# Altium PCB PCB_Robot_Version_1_2_2022-05-04.pcbdoc (part 1 of 2)
Units mil, origin at the board's own origin, x right, y up, seen from the top; angles counter-clockwise.
Board outline 7789.53 x 3844.65 mil, 2 copper layers (Top Layer, Bottom Layer); 136 components, 177 nets, 580 pads, 381 vias.
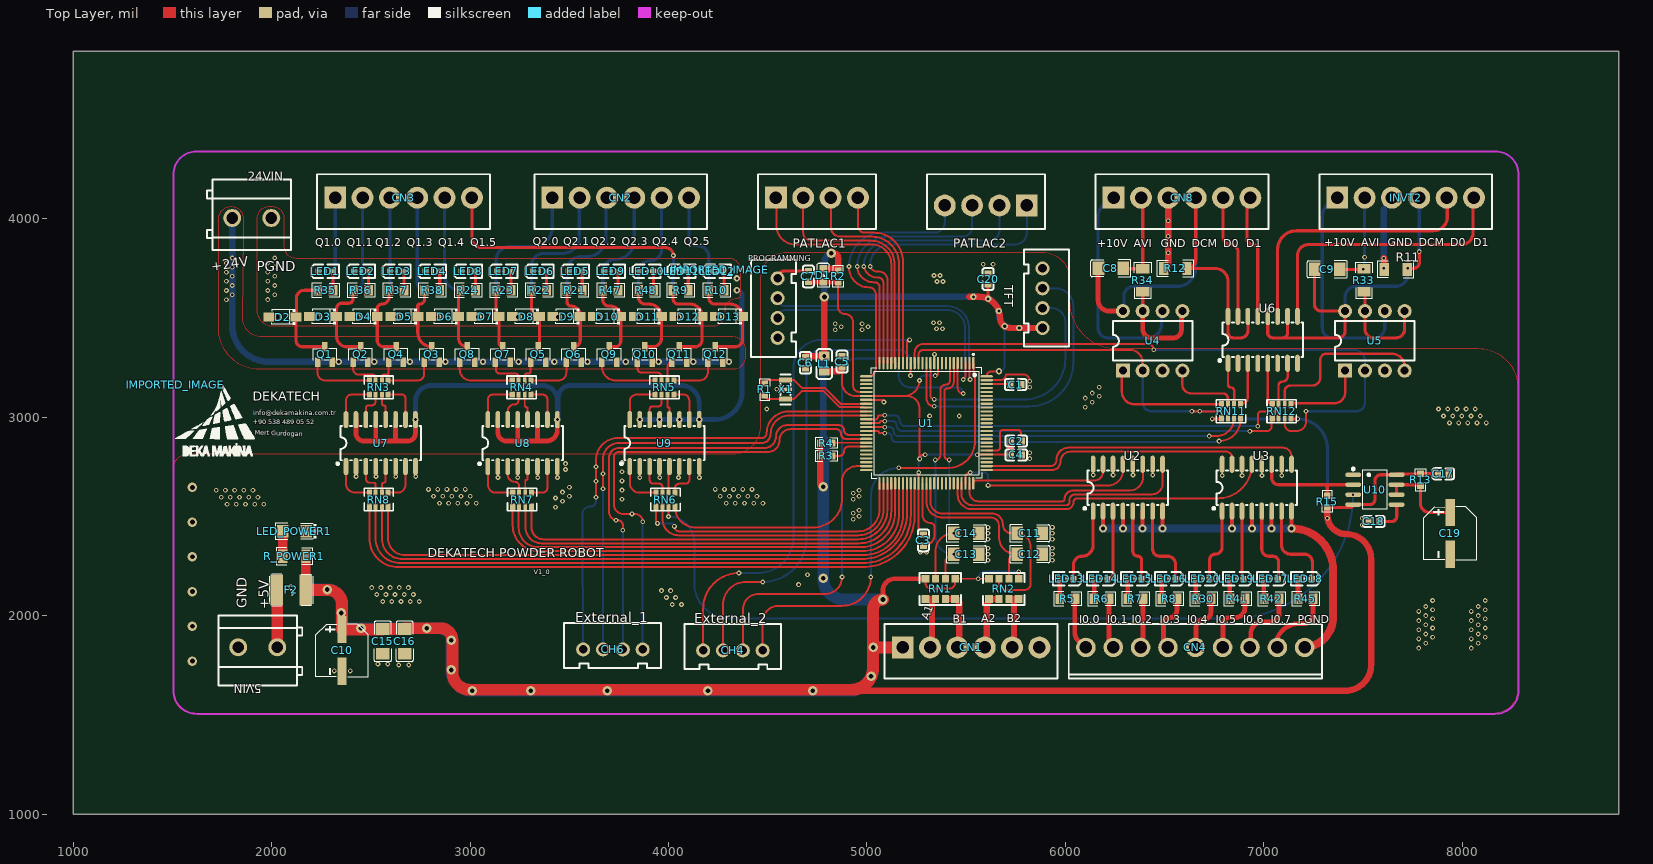
[diagram p0: Top Layer view]
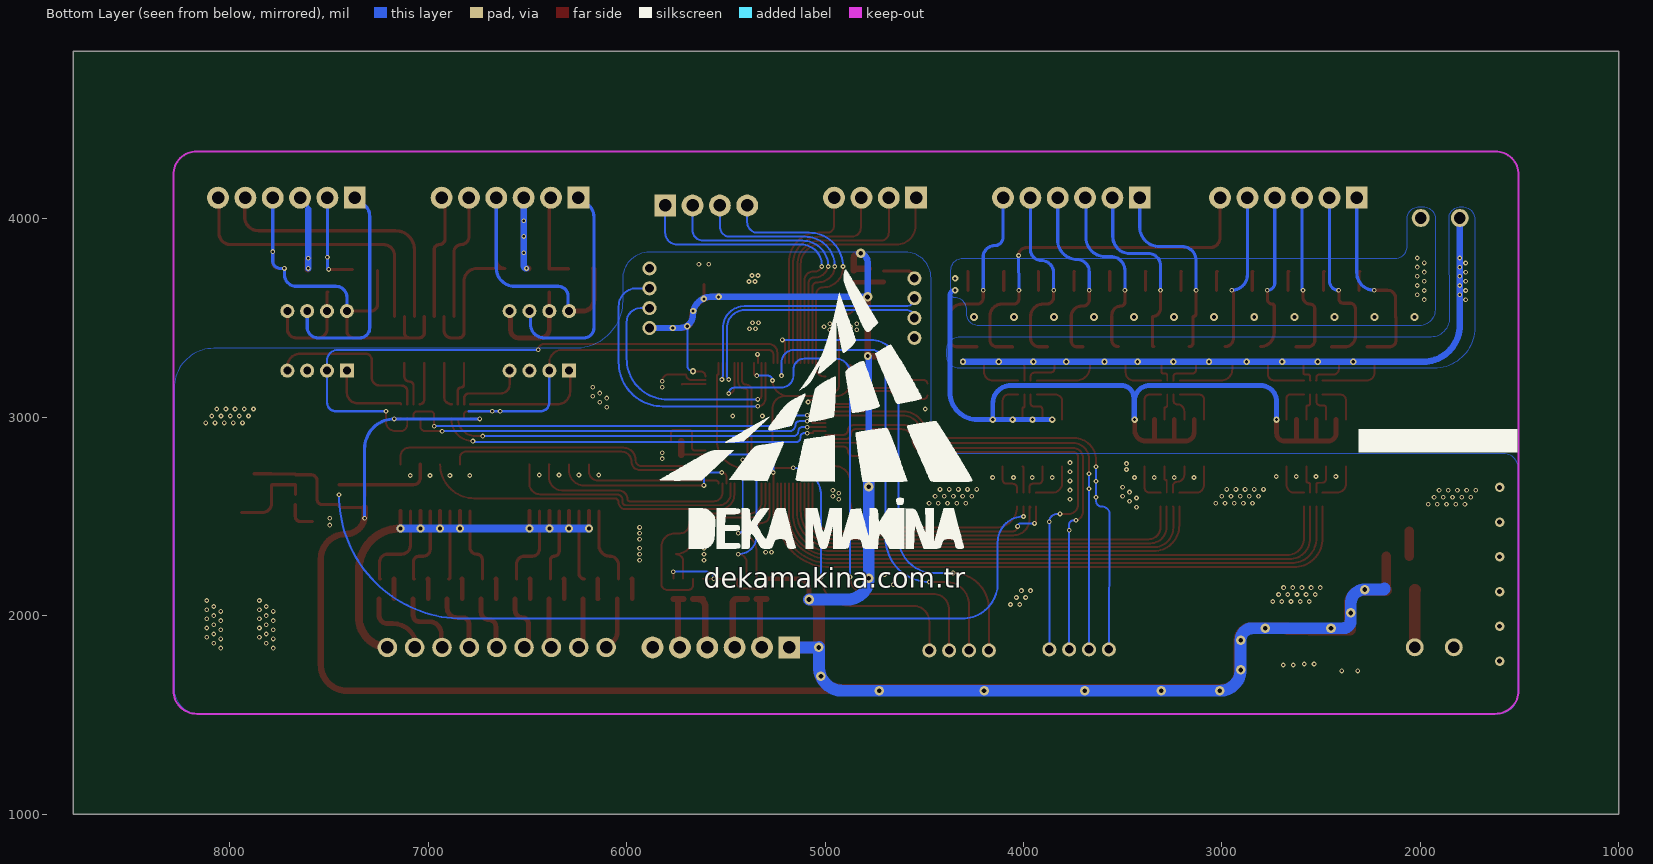
[diagram p1: Bottom Layer view, seen from below]

## Layer stack, top to bottom
Top Layer: signal copper (thickness not stored)
Dielectric: dielectric 12.6, FR-4, Dk 4.8
Bottom Layer: signal copper (thickness not stored)

## Board outline
8789.53,1000 1000,1000 1000,4844.65 8789.53,4844.65

## Components (designator, comment, footprint, x,y, rotation, side; value= is the part's Value field where it differs from the comment)
5VIN "DG125-5.0-02P-14-00A(H)" CONN-TH_DG125-5.0-02P-14-00A 1930.08,1824.65 r180 top
24VIN "DG125-5.0-02P-14-00A(H)" CONN-TH_DG125-5.0-02P-14-00A 1900.08,4019.65 r0 top
C1 "0.1u" C0603 5750.08,3164.65 r180 top
C2 "0.1u" C0603 5752.58,2879.65 r180 top
C3 "0.1u" C0603 5285.08,2379.65 r90 top
C4 "0.1u" C0603 5752.58,2809.65 r180 top
C5 "0.1u" C0603 4875.08,3279.65 r270 top
C6 "1u" C0603 4690.08,3274.65 r90 top
C7 "100nF" C0603 4705.08,3709.65 r90 top
C8 "10u" C1206 6230.08,3749.65 r0 top
C9 "10u" C1206 7320.08,3744.65 r0 top
C10 "220uF" CAP-SMD_BD6.3-L6.6-W6.6-FD 2355.08,1824.65 r270 top
C11 "0.01u" C1206 5820.08,2414.65 r180 top
C12 "0.01u" C1206 5820.08,2309.65 r180 top
C13 "0.01u" C1206 5500.08,2309.65 r180 top
C14 "0.01u" C1206 5500.08,2414.65 r180 top
C15 "0.1u" C1206 2560.08,1869.65 r90 top
C16 "0.1u" C1206 2670.08,1869.65 r90 top
C17 "0.1u" C0603 7905.08,2714.65 r0 top
C18 "10nF" C0603 7555.08,2474.65 r0 top
C19 "220uF" CAP-SMD_BD6.3-L6.6-W6.6-FD 7940.08,2414.65 r270 top
C20 "0.1u" C0603 5610.93,3696.26 r270 top
CH4 "Expin" DS1069-4 4375.08,1824.65 r180 top
CH6 "Expin1" DS1069-4 3770.08,1829.65 r180 top
CN1 "JL15EDGVC-35006G01" CONN-TH_6P-P3.50_JL15EDGVC-35006G01 5525.08,1839.65 r0 top
CN2 "JL15EDGVC-35006G01" CONN-TH_6P-P3.50_JL15EDGVC-35006G01 3759.01,4106.2 r0 top
CN3 "JL15EDGVC-35006G01" CONN-TH_6P-P3.50_JL15EDGVC-35006G01 2665.08,4106.2 r0 top
CN4 "JL15EDGVC-35009G01" CONN-TH_9P-P3.50_JL15EDGVC-35009G01 6655.08,1839.65 r0 top
CN8 "JL15EDGVC-35006G01" CONN-TH_6P-P3.50_JL15EDGVC-35006G01 6588.17,4106.2 r0 top
D1 "TS4148C" D0603 4780.08,3714.65 r270 top
D2 "ES1006FL-R1-00001" SOD-123FL_L2.7-W1.8-LS3.8-RD 2055.08,3504.65 r180 top
D3 "ES1006FL-R1-00001" SOD-123FL_L2.7-W1.8-LS3.8-RD 2259.62,3507.15 r180 top
D4 "ES1006FL-R1-00001" SOD-123FL_L2.7-W1.8-LS3.8-RD 2464.17,3507.15 r180 top
D5 "ES1006FL-R1-00001" SOD-123FL_L2.7-W1.8-LS3.8-RD 2668.71,3507.15 r180 top
D6 "ES1006FL-R1-00001" SOD-123FL_L2.7-W1.8-LS3.8-RD 2873.26,3507.15 r180 top
D7 "ES1006FL-R1-00001" SOD-123FL_L2.7-W1.8-LS3.8-RD 3077.81,3507.15 r180 top
D8 "ES1006FL-R1-00001" SOD-123FL_L2.7-W1.8-LS3.8-RD 3282.35,3507.15 r180 top
D9 "ES1006FL-R1-00001" SOD-123FL_L2.7-W1.8-LS3.8-RD 3486.9,3507.15 r180 top
D10 "ES1006FL-R1-00001" SOD-123FL_L2.7-W1.8-LS3.8-RD 3691.44,3507.15 r180 top
D11 "ES1006FL-R1-00001" SOD-123FL_L2.7-W1.8-LS3.8-RD 3895.99,3507.15 r180 top
D12 "ES1006FL-R1-00001" SOD-123FL_L2.7-W1.8-LS3.8-RD 4100.54,3507.15 r180 top
D13 "ES1006FL-R1-00001" SOD-123FL_L2.7-W1.8-LS3.8-RD 4305.08,3507.15 r180 top
F2 "FSMD050-30-R" F1812 2100.08,2129.65 r180 top
IMPORTED_IMAGE "IMPORTED_IMAGE" IMPORTED_IMAGE 4258.7,3744.16 r0 top
IMPORTED_IMAGE "IMPORTED_IMAGE" IMPORTED_IMAGE 1514.18,3163.4 r0 top
INVT2 "JL15EDGVC-35006G01" CONN-TH_6P-P3.50_JL15EDGVC-35006G01 7715.08,4106.2 r0 top
L1 "10uH" L0805 4785.08,3269.65 r90 top
LED1 "HL-PST-1608S22OC" LED0603-R-RD_ORANGE 2270.45,3734.65 r0 top
LED2 "HL-PST-1608S22OC" LED0603-R-RD_ORANGE 2450.45,3734.65 r0 top
LED3 "HL-PST-1608S22OC" LED0603-R-RD_ORANGE 2630.45,3734.65 r0 top
LED4 "HL-PST-1608S22OC" LED0603-R-RD_ORANGE 2810.45,3734.65 r0 top
LED5 "HL-PST-1608S22OC" LED0603-R-RD_ORANGE 3530.45,3734.65 r0 top
LED6 "HL-PST-1608S22OC" LED0603-R-RD_ORANGE 3350.45,3734.65 r0 top
LED7 "HL-PST-1608S22OC" LED0603-R-RD_ORANGE 3170.45,3734.65 r0 top
LED8 "HL-PST-1608S22OC" LED0603-R-RD_ORANGE 2990.45,3734.65 r0 top
LED9 "HL-PST-1608S22OC" LED0603-R-RD_ORANGE 3710.45,3734.65 r0 top
LED10 "HL-PST-1608S22OC" LED0603-R-RD_ORANGE 3890.45,3734.65 r0 top
LED11 "HL-PST-1608S22OC" LED0603-R-RD_ORANGE 4066.44,3734.65 r0 top
LED12 "HL-PST-1608S22OC" LED0603-R-RD_ORANGE 4245.95,3734.65 r0 top
LED13 "HL-PST-1608S22OC" LED0603-R-RD_ORANGE 6007.94,2184.65 r180 top
LED14 "HL-PST-1608S22OC" LED0603-R-RD_ORANGE 6179.36,2184.65 r180 top
LED15 "HL-PST-1608S22OC" LED0603-R-RD_ORANGE 6350.79,2184.65 r180 top
LED16 "HL-PST-1608S22OC" LED0603-R-RD_ORANGE 6522.22,2184.65 r180 top
LED17 "HL-PST-1608S22OC" LED0603-R-RD_ORANGE 7036.51,2184.65 r180 top
LED18 "HL-PST-1608S22OC" LED0603-R-RD_ORANGE 7207.94,2184.65 r180 top
LED19 "LED19" LED0603-R-RD_ORANGE 6865.08,2184.65 r180 top
LED20 "HL-PST-1608S22OC" LED0603-R-RD_ORANGE 6693.65,2184.65 r180 top
LED_POWER1 "15-21SURC/S530-A3/TR8" LED1206-R-RD 2115.08,2424.65 r180 top
PATLAC1 "JL15EDGVC-35004G01" CONN-TH_4P-P3.50_JL15EDGVC-35004G01 4748.13,4106.2 r0 top
PATLAC2 "JL15EDGVC-35004G01" CONN-TH_4P-P3.50_JL15EDGVC-35004G01 5599.25,4066.83 r180 top
PROGRAMMING "CHU-4 (DS1069-4 M)" DS1069-4 4550.08,3599.65 r270 top
Q1 "MMBT2907ALT1G" SOT-23-3_L2.9-W1.3-P1.90-LS2.4-BR 2269.09,3316.14 r270 top
Q2 "MMBT2907ALT1G" SOT-23-3_L2.9-W1.3-P1.90-LS2.4-BR 2448.18,3316.14 r270 top
Q3 "MMBT2907ALT1G" SOT-23-3_L2.9-W1.3-P1.90-LS2.4-BR 2806.36,3316.14 r270 top
Q4 "MMBT2907ALT1G" SOT-23-3_L2.9-W1.3-P1.90-LS2.4-BR 2627.27,3316.14 r270 top
Q5 "MMBT2907ALT1G" SOT-23-3_L2.9-W1.3-P1.90-LS2.4-BR 3343.64,3316.14 r270 top
Q6 "MMBT2907ALT1G" SOT-23-3_L2.9-W1.3-P1.90-LS2.4-BR 3522.73,3316.14 r270 top
Q7 "MMBT2907ALT1G" SOT-23-3_L2.9-W1.3-P1.90-LS2.4-BR 3164.55,3316.14 r270 top
Q8 "MMBT2907ALT1G" SOT-23-3_L2.9-W1.3-P1.90-LS2.4-BR 2985.45,3316.14 r270 top
Q9 "MMBT2907ALT1G" SOT-23-3_L2.9-W1.3-P1.90-LS2.4-BR 3701.82,3316.14 r270 top
Q10 "MMBT2907ALT1G" SOT-23-3_L2.9-W1.3-P1.90-LS2.4-BR 3880.9,3316.14 r270 top
Q11 "MMBT2907ALT1G" SOT-23-3_L2.9-W1.3-P1.90-LS2.4-BR 4055.08,3316.14 r270 top
Q12 "MMBT2907ALT1G" SOT-23-3_L2.9-W1.3-P1.90-LS2.4-BR 4235.49,3316.14 r270 top
R1 "1M" R0603 4485.08,3139.65 r270 top
R2 "10k" R0603_NEW 4855.08,3709.65 r90 top
R3 "10k" R0603_NEW 4795.08,2804.65 r180 top
R4 "10k" R0603_NEW 4795.08,2869.65 r180 top
R5 "2.2k" R1206#1 6010.08,2084.65 r180 top
R6 "2.2k" R1206#1 6181.51,2084.65 r180 top
R7 "2.2k" R1206#1 6352.94,2084.65 r180 top
R8 "2.2k" R1206#1 6524.37,2084.65 r180 top
R9 "5.6k" R0805 4061.44,3639.65 r180 top
R10 "5.6k" R0805 4241.44,3639.65 r180 top
R11 "0" R1206#2 7665.08,3744.65 r0 top
R12 "0" R1206#2 6555.08,3749.65 r0 top
R13 "10k" R0603 7790.08,2684.65 r270 top
R15 "10k" R0603 7320.08,2574.65 r90 top
R21 "5.6k" R0805 3527.43,3639.65 r180 top
R22 "5.6k" R0805 3347.93,3639.65 r180 top
R23 "5.6k" R0805 3168.43,3639.65 r180 top
R24 "5.6k" R0805 2988.92,3639.65 r180 top
R30 "2.2k" R1206#1 6695.79,2084.65 r180 top
R33 "2.2k" R1206#2 7505.08,3689.65 r270 top
R34 "2.2k" R1206#2 6390.08,3689.65 r270 top
R35 "5.6k" R0805 2270.91,3639.65 r180 top
R36 "5.6k" R0805 2450.41,3639.65 r180 top
R37 "5.6k" R0805 2629.91,3639.65 r180 top
R38 "5.6k" R0805 2809.42,3639.65 r180 top
R41 "2.2k" R1206#1 6867.22,2084.65 r180 top
R42 "2.2k" R1206#1 7038.65,2084.65 r180 top
R45 "2.2k" R1206#1 7210.08,2084.65 r180 top
R47 "5.6k" R0805 3706.94,3639.65 r180 top
R48 "5.6k" R0805 3886.44,3639.65 r180 top
R_POWER1 "4.7k" R1206#2 2115.08,2299.65 r180 top
RN1 "YC324-JK-0710KL" RES-ARRAY-SMD_0805-8P-L5.08-W3.2-BL 5370.08,2134.65 r0 top
RN2 "YC324-JK-0710KL" RES-ARRAY-SMD_0805-8P-L5.08-W3.2-BL 5690.08,2134.65 r0 top
RN3 "33kΩ" RES-ARRAY-SMD_0603-8P-L3.2-W1.6-BL 2540.08,3149.65 r0 top
RN4 "33kΩ" RES-ARRAY-SMD_0603-8P-L3.2-W1.6-BL 3260.08,3149.65 r0 top
RN5 "33kΩ" RES-ARRAY-SMD_0603-8P-L3.2-W1.6-BL 3980.08,3149.65 r0 top
RN6 "470" RES-ARRAY-SMD_0603-8P-L3.2-W1.6-BL 3985.08,2584.65 r0 top
RN7 "470" RES-ARRAY-SMD_0603-8P-L3.2-W1.6-BL 3262.58,2584.65 r0 top
RN8 "470" RES-ARRAY-SMD_0603-8P-L3.2-W1.6-BL 2540.08,2584.65 r0 top
RN11 "470" RES-ARRAY-SMD_0603-8P-L3.2-W1.6-BL 6835.08,3029.65 r0 top
RN12 "470" RES-ARRAY-SMD_0603-8P-L3.2-W1.6-BL 7090.08,3029.65 r0 top
TFT "CHU-4 (DS1069-4 M)" DS1069-4 5885.08,3549.65 r90 top
U1 "ATMEGA2560-16AU" TQFP-100_L14.0-W14.0-P0.50-LS16.0-BL 5300.08,2969.65 r180 top
U2 "IS2801-4" SOP-16_L10.3-W4.4-P1.27-LS7.0-BL 6315.08,2644.65 r0 top
U3 "IS2801-4" SOP-16_L10.3-W4.4-P1.27-LS7.0-BL 6965.08,2644.65 r0 top
U4 "MCT6" DIP-8_L9.7-W6.4-P2.54-LS7.6-BL 6440.08,3384.65 r0 top
U5 "MCT6" DIP-8_L9.7-W6.4-P2.54-LS7.6-BL 7560.08,3384.65 r0 top
U6 "IS2801-4" SOP-16_L10.3-W4.4-P1.27-LS7.0-BL 6995.08,3389.65 r0 top
U7 "IS2801-4" SOP-16_L10.3-W4.4-P1.27-LS7.0-BL 2550.08,2869.65 r0 top
U8 "IS2801-4" SOP-16_L10.3-W4.4-P1.27-LS7.0-BL 3265.08,2869.65 r0 top
U9 "IS2801-4" SOP-16_L10.3-W4.4-P1.27-LS7.0-BL 3980.08,2869.65 r0 top
U10 "NE555DR" SOIC-8_L4.9-W3.9-P1.27-LS6.0-BL 7560.08,2634.65 r270 top
X1 "16MHz" OSC-SMD_3P-L3.2-W1.3-P1.2-L 4590.08,3139.65 r270 top

## Footprints (in the part's own frame and the unit in brackets; to place one, negate y for a bottom-side part, rotate by r counter-clockwise, add the part's x,y. Pads: shape width x height; smd on the part's side, far side on the other; paste and mask are expansions set on the pad)
C0603 [mm]
  rect 0.8x0.9 smd: 1(-0.7,0) 2(0.7,0)
  silkscreen extent -1.41,-0.71 1.39,0.72
C1206 [mm]
  rect 1.485x1.728 smd: 1(-1.593,0) 2(1.593,0)
  silkscreen extent -2.56,-1.09 2.56,1.09
CAP-SMD_BD6.3-L6.6-W6.6-FD [mm]
  rect 3.5x1.2 smd: 1(-2.67,0) 2(2.67,0)
  silkscreen extent -3.38,-3.38 3.38,3.38
CONN-TH_4P-P3.50_JL15EDGVC-35004G01 [mm]
  rect 2.8x2.8 hole 1.6: 1(-5.25,0)
  round 2.8 hole 1.6: 2(-1.75,0) 3(1.75,0) 4(5.25,0)
  silkscreen extent -7.56,-4 7.55,3
CONN-TH_6P-P3.50_JL15EDGVC-35006G01 [mm]
  rect 2.8x2.8 hole 1.6: 1(-8.75,0)
  round 2.8 hole 1.6: 2(-5.25,0) 3(-1.75,0) 4(1.75,0) 5(5.25,0) 6(8.75,0)
  silkscreen extent -11.05,-4 11.05,3
CONN-TH_9P-P3.50_JL15EDGVC-35009G01 [mm]
  round 2.5 hole 1.6: 1(-14,0) 2(-10.5,0) 3(-7,0) 4(-3.5,0) 5(0,0) 6(3.5,0) 7(7,0) 8(10.5,0) 9(14,0)
  silkscreen extent -16.2,-4 16.2,3
CONN-TH_DG125-5.0-02P-14-00A [mm]
  round 2.3 hole 1.5: 1(-2.5,-0.4) 2(2.5,-0.4)
  silkscreen extent -5.7,-4.5 5,4.5
D0603 [mm]
  rect 0.9x1 smd: 1(-0.85,0) 2(0.85,0)
  silkscreen extent -1.55,-0.75 1.55,0.75
DIP-8_L9.7-W6.4-P2.54-LS7.6-BL [mm]
  rect 1.8x1.8 hole 1: 1(-3.81,-3.81)
  round 1.8 hole 1: 2(-1.27,-3.81) 3(1.27,-3.81) 4(3.81,-3.81) 5(3.81,3.81) 6(1.27,3.81) 7(-1.27,3.81) 8(-3.81,3.81)
  silkscreen extent -5.08,-2.53 5.08,2.53
DS1069-4 [mm]
  round 1.8 hole 1.1: 1(-2.54,0) 2(0,0) 3(2.54,0) 4(5.08,0)
  silkscreen extent -4.9,-3.4 7.5,2.35
F1812 [mm]
  rect 1.6x4 smd: 1(-1.853,0) 2(1.853,0)
  silkscreen extent -2.79,-2.03 2.79,2.03
IMPORTED_IMAGE [mil]
L0805 [mil]
  rect 44.59x54.21 smd: 1(-38.05,0) 2(38.04,0)
  silkscreen extent -77,-40 73,40
LED0603-R-RD_ORANGE [mm]
  rect 0.8x0.8 smd: 1(0.851,0) 2(-0.851,0)
  silkscreen extent -1.82,-0.86 1.77,0.86
LED1206-R-RD [mm]
  rect 1.485x1.62 smd: 1(1.493,0) 2(-1.492,0)
  silkscreen extent -2.77,-1.04 2.46,1.04
OSC-SMD_3P-L3.2-W1.3-P1.2-L [mm]
  rect 0.65x1.7 smd: 1(-1.2,0) 3(1.2,0)
  rect 0.5x1.7 smd: 2(0,0)
  silkscreen extent -1.9,-0.65 1.9,0.65
R0603 [mil]
  rect 31.75x34.02 smd: 1(-29.65,0) 2(29.66,0)
  silkscreen extent -55,-26 55,26
R0603_NEW [mil]
  rect 31.75x34.02 smd: 1(-29.66,0) 2(29.65,0)
  silkscreen extent -55,-26 55,26
R0805 [mil]
  rect 44.59x54.21 smd: 1(-38.04,0) 2(38.04,0)
  silkscreen extent -69,-36 69,36
R1206#1 [mil]
  rect 44.59x54.21 smd: 1(-38.04,0) 2(38.04,0)
  silkscreen extent -69,-36 69,36
R1206#2 [mil]
  rect 47.54x66.97 smd: 1(-58.22,0) 2(58.22,0)
  silkscreen extent -91,-42 91,42
RES-ARRAY-SMD_0603-8P-L3.2-W1.6-BL [mm]
  rect 0.65x0.8 smd: 1(-1.2,-0.9) 4(1.2,-0.9) 5(1.2,0.9) 8(-1.2,0.9)
  rect 0.5x0.8 smd: 2(-0.4,-0.9) 3(0.4,-0.9) 6(0.4,0.9) 7(-0.4,0.9)
  silkscreen extent -1.87,-1.45 1.87,1.47
RES-ARRAY-SMD_0805-8P-L5.08-W3.2-BL [mm]
  rect 1x1 smd: 1(-1.905,-1.3) 4(1.88,-1.3) 5(1.905,1.3) 8(-1.905,1.3)
  rect 0.9x1 smd: 2(-0.635,-1.3) 3(0.635,-1.3) 6(0.635,1.3) 7(-0.635,1.3)
  silkscreen extent -2.67,-2.03 2.67,2.03
SOD-123FL_L2.7-W1.8-LS3.8-RD [mm]
  rect 1.4x1.2 smd: 1(-1.735,0) 2(1.735,0)
  silkscreen extent -1.6,-1 1.38,1
SOIC-8_L4.9-W3.9-P1.27-LS6.0-BL [mm]
  oval 0.588x2.045 smd: 1(-1.905,-2.773) 2(-0.635,-2.773) 3(0.635,-2.773) 4(1.905,-2.773) 5(1.905,2.773) 6(0.635,2.773) 7(-0.635,2.773) 8(-1.905,2.773)
  silkscreen extent -2.8,-2.92 2.53,1.52
SOP-16_L10.3-W4.4-P1.27-LS7.0-BL [mm]
  oval 0.6x2.2 smd: 1(-4.445,-3) 2(-3.175,-3) 3(-1.905,-3) 4(-0.635,-3) 5(0.635,-3) 6(1.905,-3) 7(3.175,-3) 8(4.445,-3) 9(4.445,3) 10(3.175,3) 11(1.905,3) 12(0.635,3) 13(-0.635,3) 14(-1.905,3) 15(-3.175,3) 16(-4.445,3)
  silkscreen extent -5.66,-2.79 5.15,2.2
SOT-23-3_L2.9-W1.3-P1.90-LS2.4-BR [mm]
  rect 1.25x0.7 smd: 1(1,-0.95) 2(1,0.95) 3(-1,0)
  silkscreen extent -0.73,-1.53 0.73,1.53
TQFP-100_L14.0-W14.0-P0.50-LS16.0-BL [mm]
  oval 0.28x1.6 smd: 1(-6,-7.7) 2(-5.5,-7.7) 3(-5,-7.7) 4(-4.5,-7.7) 5(-4,-7.7) 6(-3.5,-7.7) 7(-3,-7.7) 8(-2.5,-7.7) 9(-2,-7.7) 10(-1.5,-7.7) 11(-1,-7.7) 12(-0.5,-7.7) 13(0,-7.7) 14(0.5,-7.7) 15(1,-7.7) 16(1.5,-7.7) 17(2,-7.7) 18(2.5,-7.7) 19(3,-7.7) 20(3.5,-7.7) 21(4,-7.7) 22(4.5,-7.7) 23(5,-7.7) 24(5.5,-7.7) 25(6,-7.7) 51(6,7.7) 52(5.5,7.7) 53(5,7.7) 54(4.5,7.7) 55(4,7.7) 56(3.5,7.7) 57(3,7.7) 58(2.5,7.7) 59(2,7.7) 60(1.5,7.7) 61(1,7.7) 62(0.5,7.7) 63(0,7.7) 64(-0.5,7.7) 65(-1,7.7) 66(-1.5,7.7) 67(-2,7.7) 68(-2.5,7.7) 69(-3,7.7) 70(-3.5,7.7) 71(-4,7.7) 72(-4.5,7.7) 73(-5,7.7) 74(-5.5,7.7) 75(-6,7.7)
  oval 1.6x0.28 smd: 26(7.7,-6) 27(7.7,-5.5) 28(7.7,-5) 29(7.7,-4.5) 30(7.7,-4) 31(7.7,-3.5) 32(7.7,-3) 33(7.7,-2.5) 34(7.7,-2) 35(7.7,-1.5) 36(7.7,-1) 37(7.7,-0.5) 38(7.7,0) 39(7.7,0.5) 40(7.7,1) 41(7.7,1.5) 42(7.7,2) 43(7.7,2.5) 44(7.7,3) 45(7.7,3.5) 46(7.7,4) 47(7.7,4.5) 48(7.7,5) 49(7.7,5.5) 50(7.7,6) 76(-7.7,6) 77(-7.7,5.5) 78(-7.7,5) 79(-7.7,4.5) 80(-7.7,4) 81(-7.7,3.5) 82(-7.7,3) 83(-7.7,2.5) 84(-7.7,2) 85(-7.7,1.5) 86(-7.7,1) 87(-7.7,0.5) 88(-7.7,0) 89(-7.7,-0.5) 90(-7.7,-1) 91(-7.7,-1.5) 92(-7.7,-2) 93(-7.7,-2.5) 94(-7.7,-3) 95(-7.7,-3.5) 96(-7.7,-4) 97(-7.7,-4.5) 98(-7.7,-5) 99(-7.7,-5.5) 100(-7.7,-6)
  silkscreen extent -7.08,-8.9 7.08,7.08

## Via types
v1: diameter 24, hole 12, Top Layer to Bottom Layer, tented both sides, 310 vias
v2: diameter 32, hole 16, Top Layer to Bottom Layer, tented both sides, 26 vias
v3: diameter 48, hole 24, Top Layer to Bottom Layer, tented both sides, 24 vias
v4: diameter 40, hole 20, Top Layer to Bottom Layer, tented both sides, 21 vias

## Nets (pads, with @x,y where several pads share a name; then routed paths per layer and width w, separated by ;. In a path a pad name is that pad's centre, name@x,y a point inside that pad or via, vN(x,y) a via of type N, cw(c..) or ccw(c..) an arc to the next point about the centre after c; other vN are vias at no path point)
+5V: C6.2 C10.1 C15.2 C16.2 C17.1 C20.2 CN1.1 D1.1 F2.1 L1.2 R2.2 R3.2 R4.2 R13.1 R15.1 R_POWER1.1 RN1.5 RN1.8 RN2.5 RN2.8 RN11.1 RN12.4 TFT.1 U1.100 U10.4 U10.8 | length 19491.5
  Top Layer w10: RN1.8@5295.08,2185.83 5295.08,2167.11 ccw(c5325.93,2167.11) 5325.93,2136.26 5415.93,2136.26 ccw(c5415.93,2165.41) 5445.08,2165.41 RN1.5@5445.08,2185.83 RN2.8@5615.08,2185.83 ; U1.100@5603.23,3205.87 cw(c5628.62,3205.87) 5628.62,3231.26 v2(5665.93,3231.26) ; RN2.5@5765.08,2185.83 5765.08,2220.41 cw(c5765.93,2220.41) v1(5765.93,2221.26) ; v1(6740.93,2991.26) 6784.88,2991.26 ccw(c6784.88,2994.22) RN11.1@6787.84,2994.22 ; R15.1@7320.08,2544.99 7320.08,2492.11 ccw(c7320.93,2492.11) v1(7320.93,2491.26)
  Top Layer w16: D1.1@4780.08,3748.11 4846.28,3748.11 cw(c4846.28,3739.31) R2.2@4855.08,3739.3 ; C20.2@5610.93,3668.7 5610.93,3596.24 ccw(c5611.15,3596.24) v2@5611.15,3596.02 ; v1(6740.93,2991.26) 6784.88,2991.26 ccw(c6784.88,2994.22) RN11.1@6787.84,2994.22 ; RN12.4@7137.32,2994.21 ccw(c7140.28,2994.22) 7140.28,2991.26 v1(7170.93,2991.26) ; R15.1@7320.08,2544.99 7436.27,2544.99 ccw(c7436.27,2559.65) U10.4@7450.93,2559.65 7535.08,2559.65 ccw(c7535.08,2584.65) 7560.08,2584.65 7560.08,2669.65 7560.08,2674.65 7560.08,2679.65 cw(c7590.08,2679.65) 7590.08,2709.65 U10.8@7669.23,2709.65 cw(c7673.89,2709.65) 7673.89,2714.31 R13.1@7790.08,2714.3 cw(c7790.42,2714.31) 7790.42,2714.65 C17.1@7877.52,2714.65
  Top Layer w24: v3(5080.93,2081.26) 5080.93,2126.26 cw(c5140.5,2126.26) 5140.5,2185.83 RN1.8@5295.08,2185.83
  Top Layer w32: C6.2@4690.08,3302.2 cw(c4695.56,3302.21) 4695.56,3307.69 v4(4785.08,3307.69) 4785.08,3605.41 cw(c4785.93,3605.41) v3(4785.93,3606.26) ; v3(4727.33,1621.26) 7410.93,1621.26 ccw(c7410.93,1751.26) 7540.93,1751.26 7540.93,2286.26 ccw(c7415.93,2286.26) 7415.93,2411.26 cw(c7415.93,2507.11) 7320.08,2507.11 R15.1@7320.08,2544.99 ; R4.2@4765.42,2869.65 R3.2@4765.42,2804.65 4765.42,2664.31 ccw(c4780.08,2664.31) v3(4780.08,2649.65) ; D1.1@4780.08,3748.11 4846.28,3748.11 cw(c4846.28,3739.31) R2.2@4855.08,3739.3 4855.08,3802.11 ccw(c4830.93,3802.11) v3@4830.93,3826.26 ; 5515.93,3606.26 v2(5536.64,3606.26) 5565.93,3606.26 cw(c5565.93,3501.26) 5670.93,3501.26 ccw(c5722.54,3501.26) 5722.54,3449.65 v2(5768.12,3449.65) TFT.1@5885.08,3449.65
  Top Layer w48: F2.1@2173.05,2129.65 2173.05,2299.4 cw(c2173.3,2299.4) R_POWER1.1@2173.3,2299.65
  Top Layer w60: F2.1@2173.05,2129.65 2285.08,2129.65 cw(c2285.08,2059.65) 2355.08,2059.65 C10.1@2355.08,1929.76 2557.5,1929.77 ccw(c2557.5,1932.35) C15.2@2560.08,1932.34 C16.2@2670.08,1932.34 cw(c2673.99,1932.35) 2673.99,1936.26 2850.93,1936.26 cw(c2850.93,1876.26) 2910.93,1876.26 2910.93,1716.26 ccw(c3000.93,1716.26) 3000.93,1626.26 4920.93,1626.26 ccw(c4920.93,1736.26) 5030.93,1736.26 5030.93,1911.26 5030.93,2031.26 cw(c5080.93,2031.26) v3(5080.93,2081.26) ; v3@5030.93,1840.56 ccw(c5031.84,1840.56) 5031.84,1839.65 CN1.1@5180.59,1839.65
  Bottom Layer w10: v1(5560.93,2186.26) cw(c5595.93,2186.26) 5595.93,2221.26 v1(5765.93,2221.26) ; v2(5665.93,3231.26) ccw(c5665.93,3259.68) 5694.35,3259.68 v2(5694.36,3458.02) ; v1(7320.93,2491.26) 7320.93,2841.26
  Bottom Layer w16: v1(6740.93,2991.26) 7085.93,2991.26 v1(7170.93,2991.26) cw(c7170.93,2841.26) 7320.93,2841.26 v1(7320.93,2491.26)
  Bottom Layer w32: v3(4780.08,2649.65) 4780.08,3302.69 cw(c4785.08,3302.69) v4(4785.08,3307.69) ; v3@4830.93,3826.26 ccw(c4830.93,3781.26) 4785.93,3781.26 v3(4785.93,3606.26) 5565.93,3606.26 5575.93,3606.26 cw(c5575.93,3516.26) 5665.93,3516.26 ccw(c5732.54,3516.26) 5732.54,3449.65 TFT.1@5885.08,3449.65
  Bottom Layer w60: 2180.93,2136.26 ccw(c2185.93,2136.26) 2185.93,2131.26 v3(2280.93,2131.26) cw(c2280.93,2061.26) 2350.93,2061.26 v3(2350.93,2013.6) 2350.93,1976.26 ccw(c2390.93,1976.26) 2390.93,1936.26 v3(2450.64,1936.26) v3(2782.22,1936.26) 2845.93,1936.26 cw(c2845.93,1876.26) v3(2905.93,1876.26) v3(2905.93,1726.26) ccw(c3010.93,1726.26) v3(3010.93,1621.26) v3(3305.9,1621.26) v3(3691.62,1621.26) v3(4198.76,1621.26) v3(4727.33,1621.26) 4910.93,1621.26 ccw(c4910.93,1741.26) 5030.93,1741.26 5030.93,1841.26 ccw(c5032.54,1841.26) v3(5032.54,1839.65) CN1.1@5180.59,1839.65 ; 4780.08,2884.65 v3(4780.08,2649.65) v3(4780.08,2187.87) ccw(c4886.69,2187.87) 4886.69,2081.26 v3(5080.93,2081.26)
  other v2: 5665.27,3535.26 5611.15,3596.02
  other v3: 5021.18,1693.88 4820.93,3826.26
+10V1: CN8.1 U4.6 | length 1140
  Bottom Layer w16: CN8.1@6243.68,4088.39 ccw(c6243.68,4009.79) 6165.08,4009.79 6165.08,3609.65 6165.08,3449.65 ccw(c6215.08,3449.65) 6215.08,3399.65 6415.08,3399.65 ccw(c6415.08,3469.65) 6485.08,3469.65 6485.08,3529.65 cw(c6490.08,3529.65) U4.6@6490.08,3534.65
+10V2: INVT2.1 U5.6 | length 1136.8
  Bottom Layer w16: INVT2.1@7370.59,4088.39 ccw(c7370.59,4012.88) 7295.08,4012.88 7295.08,3829.65 7295.08,3449.65 ccw(c7345.08,3449.65) 7345.08,3399.65 7555.08,3399.65 ccw(c7555.08,3454.65) 7610.08,3454.65 U5.6@7610.08,3534.65
+24V: 24VIN.1 Q1.2 Q2.2 Q3.2 Q4.2 Q5.2 Q6.2 Q7.2 Q8.2 Q9.2 Q10.2 Q11.2 Q12.2 | length 3148.9
  Bottom Layer w32: 24VIN.1@1801.66,4003.9 v1(1801.66,3802.18) v1(1801.66,3755.93) v1(1801.66,3709.68) v1(1801.66,3663.43) v1(1801.66,3617.18) 1801.66,3463.07 ccw(c1985.08,3463.07) 1985.08,3279.65 v2(2338.68,3279.65) v2(2517.77,3279.65) v2(2696.86,3279.65) v2(2875.95,3279.65) v2(3065.08,3279.65) v2(3245.08,3279.65) v2(3425.08,3279.65) v2(3592.32,3279.65) v2(3785.08,3279.65) v2(3950.49,3279.65) v2(4124.67,3279.65) v2(4305.08,3279.65)
  other v1: 1772.18,3592.18 1772.18,3638.43 1772.18,3684.68 1772.18,3730.93 1772.18,3777.18
A: PATLAC1.1 U1.22 | length 1312.7
  Top Layer w10: PATLAC1.1@4541.43,4088.39 cw(c4541.43,4084.74) 4545.08,4084.74 4545.08,3964.65 ccw(c4640.08,3964.65) 4640.08,3869.65 5025.08,3869.65 cw(c5025.08,3771.82) 5122.91,3771.82 U1.22@5122.91,3272.8
AVI_1: C8.2 CN8.2 R34.1 | length 443.7
  Top Layer w16: C8.2@6292.78,3749.65 ccw(c6294.56,3749.65) 6294.56,3747.87 R34.1@6390.08,3747.86 6390.08,4079.79 ccw(c6381.48,4079.79) CN8.2@6381.48,4088.39
AVI_2: C9.2 INVT2.2 R33.1 | length 481.9
  Top Layer w16: C9.2@7382.78,3744.65 v1(7501.86,3744.65) ; v1(7501.86,3744.65) ccw(c7501.86,3747.87) R33.1@7505.08,3747.86 cw(c7501.86,3747.87) v1(7501.86,3744.65)
  Bottom Layer w16: v1(7501.86,3744.65) ccw(c7501.86,3751.18) 7508.39,3751.18 v1(7508.39,3806.57) 7508.39,4088.39 ccw(c7508.39,4085.08) INVT2.2@7505.08,4085.08
B: PATLAC1.2 U1.21 | length 1208.8
  Top Layer w10: PATLAC1.2@4679.24,4088.39 4679.24,3930.49 ccw(c4720.08,3930.49) 4720.08,3889.65 5020.08,3889.65 cw(c5020.08,3769.65) 5140.08,3769.65 5140.08,3275.32 ccw(c5142.6,3275.32) U1.21@5142.6,3272.8
C: PATLAC1.3 U1.20 | length 1081.3
  Top Layer w10: PATLAC1.3@4817.03,4088.39 cw(c4817.03,4085.34) 4820.08,4085.34 4820.08,3954.65 ccw(c4865.08,3954.65) 4865.08,3909.65 5025.08,3909.65 cw(c5025.08,3772.45) 5162.28,3772.45 U1.20@5162.28,3272.8
D: PATLAC1.4 U1.19 | length 970.3
  Top Layer w10: PATLAC1.4@4954.83,4088.39 4954.83,3964.9 ccw(c4990.08,3964.9) 4990.08,3929.65 5020.08,3929.65 ; 5014.32,3929.65 5035.08,3929.65 cw(c5035.08,3782.76) 5181.97,3782.76 5181.97,3761.54 U1.19@5181.97,3272.8
DCM_1: C8.1 CN8.4 R12.2 U4.8 U6.14 U6.16 | length 2250.3
  Top Layer w16: CN8.4@6657.07,4088.39 6657.07,3793.42 cw(c6613.3,3793.42) R12.2@6613.3,3749.65 6755.08,3749.65 cw(c6755.08,3684.65) 6820.08,3684.65 6820.08,3507.75 6820.08,3424.65 ccw(c6845.08,3424.65) 6845.08,3399.65 6885.08,3399.65 ccw(c6885.08,3434.65) 6920.08,3434.65 U6.14@6920.08,3507.75
  Top Layer w24: C8.1@6167.38,3749.65 ccw(c6167.38,3747.35) 6165.08,3747.35 6165.08,3709.65 6165.08,3589.65 ccw(c6220.08,3589.65) 6220.08,3534.65 U4.8@6290.08,3534.65
  Bottom Layer w16: U4.8@6290.08,3534.65 ccw(c6290.08,3539.65) 6295.08,3539.65 6295.08,3609.65 cw(c6345.08,3609.65) 6345.08,3659.65 6565.08,3659.65 ccw(c6565.08,3751.64) 6657.07,3751.64 CN8.4@6657.07,4088.39
DCM_2: C9.1 INVT2.4 R11.2 U5.8 U6.10 U6.12 | length 2101.2
  Top Layer w16: U6.12@7020.08,3507.75 7020.08,3424.65 ccw(c7045.08,3424.65) 7045.08,3399.65 7095.08,3399.65 ccw(c7095.08,3424.65) 7120.08,3424.65 U6.10@7120.08,3507.75 ; 7068.92,3399.65 7375.08,3399.65 ccw(c7375.08,3434.65) 7410.08,3434.65 U5.8@7410.08,3534.65 7290.08,3534.65 cw(c7290.08,3569.65) 7255.08,3569.65 ; 7255.08,3566.95 C9.1@7255.08,3739.65 ; R11.2@7723.3,3744.65 cw(c7728.3,3744.65) 7728.3,3749.65 7755.08,3749.65 ccw(c7755.08,3778.55) 7783.98,3778.55 v1(7783.98,3834.55)
  Bottom Layer w16: U5.8@7410.08,3534.65 7410.08,3604.65 cw(c7465.08,3604.65) 7465.08,3659.65 7665.08,3659.65 ccw(c7665.08,3719.65) 7725.08,3719.65 v1(7725.08,3749.65) 7745.08,3749.65 ccw(c7745.08,3788.55) 7783.98,3788.55 INVT2.4@7783.98,4088.39
DTR: C7.2 PROGRAMMING.1 | length 176.4
  Top Layer w16: PROGRAMMING.1@4550.08,3699.65 cw(c4587.64,3699.65) 4587.64,3737.2 C7.2@4705.08,3737.2
EMERGENCY: CN4.5 R30.1 | length 282.3
  Top Layer w24: CN4.5@6665.08,1860.76 cw(c6658.97,1860.76) 6658.97,1854.65 6658.97,1943.54 cw(c6695.08,1943.54) 6695.08,1979.65 ccw(c6695.08,2018.41) 6733.84,2018.41 R30.1@6733.83,2084.65
EMERGENCY_IN: U1.76 U3.15 | length 1340.8
  Top Layer w10: U1.76@5603.23,2733.43 5933.1,2733.43 ccw(c5933.1,2776.26) 5975.93,2776.26 cw(c6025.93,2776.26) 6025.93,2826.26 6810.93,2826.26 cw(c6810.93,2797.11) 6840.08,2797.11 U3.15@6840.08,2762.75
ENC_IN_1+: C14.2 RN1.7 U1.6 | length 1194.2
  Top Layer w10: RN1.7@5345.08,2185.83 5345.08,2322.35 cw(c5437.38,2322.35) v1(5437.38,2414.65) ; v1(5415.08,2784.65) cw(c5415.08,2809.65) 5390.08,2809.65 5390.08,2829.65 5390.08,3129.65 cw(c5405.08,3129.65) 5405.08,3144.65 5405.66,3144.65 ccw(c5405.66,3176.86) 5437.87,3176.86 U1.6@5437.87,3272.8
  Bottom Layer w10: v1(5415.08,2784.65) 5415.08,2436.95 ccw(c5437.38,2436.95) v1(5437.38,2414.65)
ENC_IN_1-: C13.2 RN1.6 U1.7 | length 1205.5
  Top Layer w10: v1(5345.08,2784.65) ccw(c5345.08,2809.65) 5370.08,2809.65 5370.08,2829.65 5370.08,3134.65 cw(c5400.08,3134.65) 5400.08,3164.65 ccw(c5400.08,3182.76) 5418.19,3182.76 U1.7@5418.19,3272.8 ; RN1.6@5395.08,2185.83 5395.08,2267.35 cw(c5437.38,2267.35) v1(5437.38,2309.65)
  Bottom Layer w10: v1(5345.08,2784.65) 5345.08,2401.95 ccw(c5437.38,2401.95) v1(5437.38,2309.65)
  other v1: 5437.38,2309.65
ENC_IN_2+: C11.2 RN2.7 U1.64 | length 1136.9
  Top Layer w10: U1.64@5319.76,2666.5 5319.76,2574.97 ccw(c5380.08,2574.97) 5380.08,2514.65 5630.08,2514.65 cw(c5630.08,2459.65) 5685.08,2459.65 ccw(c5730.08,2459.65) 5730.08,2414.65 C11.2@5757.38,2414.65 cw(c5757.38,2346.95) 5825.08,2346.95 5825.08,2159.65 cw(c5795.08,2159.65) 5795.08,2129.65 5690.08,2129.65 cw(c5690.08,2154.65) 5665.08,2154.65 RN2.7@5665.08,2185.83
ENC_IN_2-: C12.2 RN2.6 U1.63 | length 923.9
  Top Layer w10: U1.63@5300.08,2666.5 5300.08,2574.65 ccw(c5380.08,2574.65) 5380.08,2494.65 5625.08,2494.65 cw(c5625.08,2454.65) 5665.08,2454.65 5665.08,2396.95 ccw(c5752.38,2396.95) C12.2@5752.38,2309.65 ; RN2.6@5715.08,2185.83 5715.08,2272.35 ; 5715.08,2272.35 cw(c5752.38,2272.35) C12.2@5752.38,2309.65 ; 5715.08,2272.35 cw(c5752.38,2272.35) C12.2@5752.38,2309.65
ENCODER_1A+: CN1.2 RN1.1 RN1.2 | length 280.7
  Top Layer w32: RN1.1@5295.08,2083.47 RN1.2@5345.08,2083.47 ; 5325.08,2083.46 cw(c5325.08,2080.16) 5328.38,2080.16 CN1.2@5328.39,1854.65
ENCODER_1B-: CN1.3 RN1.3 RN1.4 | length 290.4
  Top Layer w32: RN1.3@5395.08,2083.47 RN1.4@5444.1,2083.47 cw(c5444.1,2061.38) 5466.18,2061.38 CN1.3@5466.19,1854.65
ENCODER_2A+: CN1.4 RN2.1 RN2.2 | length 300
  Top Layer w32: 5603.97,2046.34 cw(c5641.08,2046.34) 5641.08,2083.45 ; CN1.4@5603.98,1854.65 5603.98,2046.34 ; RN2.1@5615.08,2083.45 RN2.2@5665.08,2083.45
ENCODER_2B-: CN1.5 RN2.3 RN2.4 | length 278
  Top Layer w32: RN2.3@5715.08,2083.45 RN2.4@5764.08,2083.45 ; CN1.5@5741.77,1854.65 5741.77,2083.14 cw(c5742.08,2083.14) 5742.08,2083.45
FOWARD_1: RN11.3 U1.39 | length 1931.4
  Top Layer w10: v1(5090.08,2949.65) U1.39@4997.25,2949.65 ; v1(6725.08,2904.65) 6761.26,2904.65 ccw(c6761.26,2994.22) RN11.3@6850.83,2994.21 ; U1.39@4997.25,2949.65 cw(c4997.25,2949.97) U1.39@4996.93,2949.96 ccw(c4997.25,2949.97) U1.39@4997.25,2949.65
  Bottom Layer w10: v1(5090.08,2949.65) 5115.08,2949.65 cw(c5115.08,2929.65) 5135.08,2929.65 ccw(c5160.08,2929.65) 5160.08,2904.65 5225.08,2904.65 v1(6725.08,2904.65)
FOWARD_2: RN12.1 U1.38 | length 2122.8
  Top Layer w10: U1.38@4996.93,2969.65 5060.08,2969.65 ccw(c5060.08,2974.65) 5065.08,2974.65 cw(c5070.08,2974.65) 5070.08,2979.65 v1(5090.08,2979.65) ; v1(6930.08,2929.65) 7015.08,2929.65 ccw(c7015.08,2954.65) 7040.08,2954.65 7040.08,2991.46 cw(c7042.84,2991.46) RN12.1@7042.84,2994.22
  Bottom Layer w10: v1(5090.08,2979.65) 5130.08,2979.65 cw(c5130.08,2959.65) 5150.08,2959.65 ccw(c5180.08,2959.65) 5180.08,2929.65 5215.08,2929.65 5226.42,2929.65 v1@6920.08,2929.65
FW1: RN11.6 U6.1 | length 224
  Top Layer w12: U6.1@6820.08,3271.53 6820.08,3164.65 ccw(c6835.08,3164.65) 6835.08,3149.65 cw(c6835.08,3133.9) 6850.83,3133.9 RN11.6@6850.83,3065.08
FW2: RN12.8 U6.5 | length 255.2
  Top Layer w12: U6.5@7020.08,3271.53 7020.08,3087.84 ; 7020.08,3087.84 ccw(c7042.84,3087.84) RN12.8@7042.84,3065.08 cw(c7042.84,3087.84) 7020.08,3087.84
FWD_1: CN8.5 U6.15 | length 623.6
  Top Layer w16: CN8.5@6794.86,4088.39 6794.86,3909.87 ccw(c6835.08,3909.87) 6835.08,3869.65 cw(c6835.08,3834.65) 6870.08,3834.65 U6.15@6870.08,3507.75
FWD_2: INVT2.5 U6.11 | length 1366.7
  Top Layer w16: U6.11@7070.08,3507.75 7070.08,3844.65 cw(c7165.08,3844.65) 7165.08,3939.65 7855.08,3939.65 ccw(c7855.08,4009.65) 7925.08,4009.65 7925.08,4085.08 ccw(c7921.77,4085.08) INVT2.5@7921.77,4088.39
GND: 5VIN.2 C1.1 C2.1 C3.1 C4.1 C5.1 C6.1 C10.2 C11.1 C12.1 C13.1 C14.1 C15.1 C16.1 C17.2 C18.1 C19.2 C20.1 CN1.6 LED_POWER1.2 PROGRAMMING.4 TFT.4 U1.11 U1.32 U1.62 U1.81 U1.99 U2.10 U2.12 U2.14 U2.16 U3.10 U3.12 U3.14 U3.16 U4.3 U5.3 U6.2 U6.4 U6.6 U6.8 U7.2 U7.4 U7.6 U7.8 U8.2 U8.4 U8.6 U8.8 U9.2 U9.4 U9.6 U9.8 U10.1 X1.2 | length 1092.6
  Top Layer w10: U1.32@4996.93,3087.76 5074.43,3087.76 cw(c5074.43,3076.26) v1(5085.93,3076.26) ; U1.62@5280.39,2666.5 5280.39,2506.8 ccw(c5320.93,2506.8) 5320.93,2466.26 cw(c5320.93,2446.26) 5340.93,2446.26 5340.93,2421.26 5340.93,2407.94 cw(c5285.08,2407.94) C3.1@5285.08,2352.09 ; U1.11@5339.45,3272.8 5339.45,3314.78 cw(c5340.93,3314.78) v1(5340.93,3316.26) ; U1.81@5603.23,2831.85 5656.53,2831.86 ccw(c5656.53,2846.26) 5670.93,2846.26 5670.93,2921.26 cw(c5685.93,2921.26) 5685.93,2936.26 5760.93,2936.26 cw(c5760.93,2921.26) 5775.93,2921.26 5775.93,2883.86 ccw(c5780.14,2883.86) C2.1@5780.13,2879.65 ; U1.99@5603.23,3186.18 cw(c5603.3,3186.19) 5603.3,3186.26 5650.93,3186.26 5670.93,3186.26 ccw(c5670.93,3216.26) 5700.93,3216.26 5785.93,3216.26 cw(c5785.93,3181.26) v1(5820.93,3181.26)
  other v1: 2315.93,1721.26 2395.93,1721.26 2640.93,1751.26 2690.93,1751.26 2535.93,1756.26 2585.93,1756.26 7780.93,1836.26 8045.93,1836.26 7815.93,1861.26 8080.93,1861.26 7780.93,1882.51 8045.93,1882.51 7850.93,1891.26 8115.93,1891.26 7815.93,1907.51 8080.93,1907.51 7780.93,1928.76 8045.93,1928.76 7850.93,1937.51 8115.93,1937.51 7815.93,1953.76 8080.93,1953.76 7780.93,1975.01 8045.93,1975.01 7850.93,1983.76 8115.93,1983.76 7815.93,2000.01 8080.93,2000.01 7780.93,2021.26 8045.93,2021.26 7850.93,2030.01 8115.93,2030.01 7815.93,2046.26 8080.93,2046.26 4019.68,2056.26 4065.93,2056.26 2559.68,2071.26 2605.93,2071.26 2652.18,2071.26 2698.43,2071.26 2744.68,2071.26 7850.93,2076.26 8115.93,2076.26 3989.68,2091.26 4035.93,2091.26 2529.68,2106.26 2575.93,2106.26 2622.18,2106.26 2668.43,2106.26 2714.68,2106.26 3964.68,2126.26 4010.93,2126.26 2504.68,2141.26 2550.93,2141.26 2597.18,2141.26 2643.43,2141.26 2689.68,2141.26 4655.93,2156.26 4700.93,2206.26 5610.08,2279.65 5935.08,2279.65 5610.08,2309.65 5935.08,2309.65 5270.08,2319.65 5300.08,2319.65 5610.08,2339.65 5935.08,2339.65 5610.08,2384.65 5935.08,2384.65 5610.08,2414.65 5935.08,2414.65 5610.08,2444.65 5935.08,2444.65 7495.93,2456.26 4930.93,2486.26 7495.93,2491.26 4960.93,2501.26 4930.93,2516.26 4960.93,2531.26 3430.93,2546.26 1775.93,2561.26 1822.18,2561.26 1868.43,2561.26 1914.68,2561.26 1960.93,2561.26 2845.93,2566.26 2892.18,2566.26 2938.43,2566.26 2984.68,2566.26 3030.93,2566.26 4290.93,2566.26 4337.18,2566.26 4383.43,2566.26 4429.68,2566.26 4475.93,2566.26 3465.93,2576.26 3765.93,2586.26 4930.93,2586.26 3430.93,2592.51 1745.93,2596.26 1792.18,2596.26 1838.43,2596.26 1884.68,2596.26 1930.93,2596.26 2815.93,2601.26 2862.18,2601.26 2908.43,2601.26 2954.68,2601.26 3000.93,2601.26 3500.93,2601.26 4260.93,2601.26 4307.18,2601.26 4353.43,2601.26 4399.68,2601.26 4445.93,2601.26 4960.93,2601.26 4930.93,2616.26 3465.93,2622.51 1720.93,2631.26 1767.18,2631.26 1813.43,2631.26 1859.68,2631.26 1905.93,2631.26 4960.93,2631.26 3765.93,2632.51 2790.93,2636.26 2837.18,2636.26 2883.43,2636.26 2929.68,2636.26 2975.93,2636.26 4235.93,2636.26 4282.18,2636.26 4328.43,2636.26 4374.68,2636.26 4420.93,2636.26 3500.93,2647.51 3765.93,2678.76 3140.93,2696.26 3240.93,2696.26 3340.93,2696.26 3440.93,2696.26 3855.93,2696.26 3955.93,2696.26 4050.93,2696.26 4155.93,2696.26 2425.93,2701.26 2525.93,2701.26 2625.93,2701.26 2725.93,2701.26 6790.93,2706.26 6890.93,2706.26 6990.93,2706.26 7090.93,2706.26 6140.93,2708.76 6240.93,2708.76 6340.93,2708.76 6440.93,2708.76 3765.93,2725.01 3480.93,2736.26 3480.93,2766.26 3765.93,2771.26 5820.93,2791.26 5820.93,2821.26 7935.93,2971.26 7982.18,2971.26 8028.43,2971.26 8074.68,2971.26 8120.93,2971.26 5315.93,3006.26 5465.93,3006.26 7905.93,3006.26 7952.18,3006.26 7998.43,3006.26 8044.68,3006.26 8090.93,3006.26 4495.93,3041.26 7880.93,3041.26 7927.18,3041.26 7973.43,3041.26 8019.68,3041.26 8065.93,3041.26 6100.93,3050.01 6135.93,3075.01 6100.93,3096.26 6170.93,3105.01 6135.93,3121.26 4545.93,3141.26 5820.93,3151.26 6170.93,3151.26 4840.93,3441.26 4975.93,3441.26 5350.93,3446.26 5380.93,3446.26 4870.93,3456.26 5005.93,3456.26 4840.93,3471.26 4975.93,3471.26 5335.93,3476.26 5365.93,3476.26 5353.43,3683.76 5383.43,3683.76 5338.43,3713.76 5368.43,3713.76 5585.93,3771.26 5635.93,3771.26
  other v3: 1600.93,1771.26 1600.93,1946.26 1600.93,2121.26 1600.93,2296.26 1600.93,2471.26 1600.93,2646.26
H_INPUT1: U1.75 U2.15 | length 724.7
  Top Layer w10: U1.75@5536.3,2666.5 cw(c5551.06,2666.5) 5551.06,2681.26 6145.93,2681.26 ccw(c6145.93,2725.41) 6190.08,2725.41 U2.15@6190.08,2762.75
H_INPUT2: U1.74 U2.11 | length 1138
  Top Layer w10: U1.74@5516.61,2635.57 U1.74@5516.61,2666.5 ; U1.74@5516.61,2640.46 U1.74@5516.61,2666.5 ; U2.11@6390.08,2762.75 cw(c6390.08,2761.9) 6390.93,2761.9 6390.93,2696.26 cw(c6325.93,2696.26) 6325.93,2631.26 6065.93,2631.26 6040.93,2631.26 ccw(c6040.93,2586.26) 5995.93,2586.26 cw(c5985.93,2586.26) 5985.93,2576.26 5560.93,2576.26 cw(c5560.93,2620.57) 5516.61,2620.57 U1.74@5516.61,2666.5
H_LIMIT1: CN4.1 R5.1 | length 264.1
  Top Layer w24: R5.1@6048.12,2084.65 6048.12,1914.33 ccw(c6107.8,1914.33) CN4.1@6107.8,1854.65
H_LIMIT2: CN4.3 R7.1 | length 234.3
  Top Layer w24: CN4.3@6383.38,1854.65 ccw(c6383.38,1862.25) 6390.98,1862.25 R7.1@6390.98,2084.65
INPUT_1: CN4.8 R45.1 | length 372.5
  Top Layer w24: CN4.8@7058.46,1839.65 cw(c7178.46,1839.65) 7178.46,1959.65 7205.08,1959.65 ccw(c7205.08,2002.69) 7248.12,2002.69 R45.1@7248.12,2084.65 ; CN4.8@7072.36,1854.65 ccw(c7077.36,1854.65) CN4.8@7077.36,1849.65
ISOLATED_IN1: U1.77 U3.9 | length 1654.6
  Top Layer w10: U1.77@5603.23,2753.11 5922.79,2753.12 ccw(c5922.79,2786.26) 5955.93,2786.26 cw(c6015.93,2786.26) 6015.93,2846.26 6025.93,2846.26 7095.93,2846.26 cw(c7095.93,2802.11) 7140.08,2802.11 U3.9@7140.08,2762.75
ISOLATED_OUT: CN3.6 D12.1 Q11.3 R9.2 | length 1911.5
  Top Layer w16: CN3.6@3009.57,4084.65 cw(c3009.57,4084.14) 3010.08,4084.14 3010.08,3904.65 ccw(c3060.08,3904.65) 3060.08,3854.65 3881.71,3854.65 3985.08,3854.65 cw(c3985.08,3814.65) v1(4025.08,3814.65) ; v1(4023.4,3639.65) 4023.4,3596.32 ccw(c4050.08,3596.32) 4050.08,3569.65 4110.08,3569.65 cw(c4110.08,3510.88) D12.1@4168.85,3510.88 ; Q11.3@4055.08,3355.51 ccw(c4055.94,3355.51) 4055.94,3354.65 4135.08,3354.65 ccw(c4135.08,3388.41) 4168.85,3388.41 D12.1@4168.84,3507.15
  Bottom Layer w16: v1(4023.4,3639.65) v1(4025.08,3814.65)
L1_1: C2.2 C3.2 C4.2 C5.2 L1.1 U1.10 U1.31 U1.61 U1.80 | length 2267.4
  Top Layer w10: C5.2@4875.08,3252.09 4875.08,3173.41 ccw(c4941.04,3173.41) 4941.04,3107.45 U1.31@4996.93,3107.44 5187.88,3107.45 ccw(c5187.88,3184.65) v1(5265.08,3184.65) ; 5158.07,3107.45 5199.74,3107.45 cw(c5199.74,3041.26) 5265.93,3041.26 5265.93,2790.23 cw(c5265.47,2790.23) v1(5265.47,2789.77) ; U1.61@5260.08,2665.87 cw(c5260.71,2665.87) U1.61@5260.71,2666.5 ; v1(5260.93,2721.26) ccw(c5260.93,2721.03) 5260.71,2721.03 U1.61@5260.71,2666.5 ; v1@5272.68,2789.77 v1(5265.47,2789.77) ; C3.2@5285.08,2407.2 cw(c5285.08,2431.58) 5260.71,2431.58 U1.61@5260.71,2666.5 ; v1(5293.46,2810.56) 5286.25,2810.55 ccw(c5286.25,2789.77) v1(5265.47,2789.77) ; v1(5345.08,3209.65) ccw(c5345.08,3223.7) 5359.13,3223.7 U1.10@5359.13,3272.8 ; v1(5555.93,2811.26) 5602.32,2811.26 ccw(c5602.32,2812.17) U1.80@5603.23,2812.17 5720,2812.17 cw(c5720,2809.65) C4.2@5722.52,2809.65
  Top Layer w12: C4.2@5725.02,2809.65 C2.2@5725.02,2879.65
  Top Layer w32: L1.1@4785.08,3231.6 4854.6,3231.61 ccw(c4854.6,3252.09) C5.2@4875.08,3252.09 ; C4.2@5725.02,2809.65 C2.2@5725.02,2879.65
  Bottom Layer w10: v1(5260.93,2721.26) 5260.93,2771.26 cw(c5300.93,2771.26) 5300.93,2811.26 v1(5555.93,2811.26) ; v1(5265.08,3184.65) cw(c5290.08,3184.65) 5290.08,3209.65 v1(5345.08,3209.65)
L_INPUT1: U1.73 U2.13 | length 968.7
  Top Layer w10: U1.73@5496.93,2666.5 5496.93,2697.26 cw(c5520.93,2697.26) v1(5520.93,2721.26) ; v1(5610.93,2656.26) 6215.93,2656.26 ccw(c6215.93,2730.41) 6290.08,2730.41 U2.13@6290.08,2762.75
  Bottom Layer w10: v1(5520.93,2721.26) 5545.93,2721.26 5590.93,2721.26 cw(c5590.93,2701.26) 5610.93,2701.26 v1(5610.93,2656.26)
L_INPUT2: U1.72 U2.9 | length 1268.9
  Top Layer w10: U1.72@5477.24,2666.5 ccw(c5477.24,2665.19) 5475.93,2665.19 5475.93,2616.26 ccw(c5535.93,2616.26) 5535.93,2556.26 5980.93,2556.26 6005.93,2556.26 ccw(c6005.93,2571.26) 6020.93,2571.26 6020.93,2581.94 cw(c6050.25,2581.94) 6050.25,2611.26 ; 6045.93,2611.26 6070.93,2611.26 6435.93,2611.26 ccw(c6435.93,2666.26) 6490.93,2666.26 6490.93,2761.9 ccw(c6490.08,2761.9) U2.9@6490.08,2762.75
L_LIMIT1: CN4.2 R6.1 | length 244.9
  Top Layer w24: R6.1@6219.55,2084.65 6219.55,1880.69 ccw(c6245.59,1880.69) CN4.2@6245.59,1854.65
L_LIMIT2: CN4.4 R8.1 | length 283.3
  Top Layer w24: CN4.4@6521.18,1854.65 cw(c6521.18,1880.75) 6495.08,1880.75 6495.08,1959.65 cw(c6525.08,1959.65) 6525.08,1989.65 ccw(c6525.08,2026.98) 6562.41,2026.98 R8.1@6562.41,2084.65
LED5_1: LED5.1 R21.1 | length 95.9
  Top Layer w16: LED5.1@3563.95,3734.65 cw(c3563.95,3733.12) 3565.47,3733.12 R21.1@3565.48,3639.65
LED6_1: LED6.1 R22.1 | length 96.2
  Top Layer w16: LED6.1@3383.95,3734.65 cw(c3383.95,3732.63) 3385.97,3732.63 R22.1@3385.97,3639.65
LED7_1: LED7.1 R23.1 | length 96.4
  Top Layer w16: LED7.1@3203.95,3734.65 cw(c3203.95,3732.13) 3206.47,3732.13 R23.1@3206.47,3639.65
LED8_1: LED8.1 R24.1 | length 96.7
  Top Layer w16: LED8.1@3023.95,3734.65 cw(c3023.95,3731.64) 3026.96,3731.64 R24.1@3026.96,3639.65
LED_POWER1_1: LED_POWER1.1 R_POWER1.2 | length 125.3
  Top Layer w48: LED_POWER1.1@2056.32,2424.65 cw(c2056.32,2424.11) 2056.86,2424.11 R_POWER1.2@2056.86,2299.65
MCT_1A1: RN11.8 U4.1 | length 647.5
  Top Layer w12: U4.1@6290.08,3234.65 ccw(c6290.08,3229.65) 6285.08,3229.65 6285.08,3129.65 ccw(c6349.65,3129.65) 6349.65,3065.08 RN11.8@6787.84,3065.08
MCT_1A2: RN11.7 U4.4 | length 369.1
  Top Layer w12: U4.4@6590.08,3234.65 6590.08,3164.65 ccw(c6635.08,3164.65) 6635.08,3119.65 6795.08,3119.65 cw(c6795.08,3095.4) 6819.33,3095.4 RN11.7@6819.33,3065.08
MCT_2A1: RN12.5 U5.1 | length 416.8
  Top Layer w12: RN12.5@7137.32,3065.07 cw(c7141.89,3065.08) 7141.89,3069.65 7355.08,3069.65 ccw(c7355.08,3124.65) 7410.08,3124.65 U5.1@7410.08,3234.65
MCT_2A2: RN12.6 U5.4 | length 873.3
  Top Layer w12: RN12.6@7105.83,3065.08 7105.83,3130.4 cw(c7135.08,3130.4) 7135.08,3159.65 7245.08,3159.65 ccw(c7245.08,3199.65) 7285.08,3199.65 7285.08,3289.65 cw(c7315.08,3289.65) 7315.08,3319.65 7645.08,3319.65 cw(c7645.08,3254.65) 7710.08,3254.65 U5.4@7710.08,3234.65
NEXTION_RX: TFT.3 U1.13 | length 1558.8
  Top Layer w10: U1.13@5300.08,3272.8 5300.08,3094.65 ccw(c5340.08,3094.65) v1(5340.08,3054.65)
  Bottom Layer w10: v1(5340.08,3054.65) 5820.08,3054.65 ; 5818.47,3054.65 ccw(c5818.47,3276.26) 6040.08,3276.26 6040.08,3559.65 ccw(c5950.08,3559.65) 5950.08,3649.65 TFT.3@5885.08,3649.65
NEXTION_TX: TFT.2 U1.12 | length 1319.6
  Top Layer w10: U1.12@5319.76,3272.8 5319.76,3109.97 ccw(c5340.08,3109.97) v1(5340.08,3089.65)
  Bottom Layer w10: v1(5340.08,3089.65) 5565.08,3089.65 5795.08,3089.65 ccw(c5795.08,3294.65) 6000.08,3294.65 6000.08,3479.65 ccw(c5930.08,3479.65) 5930.08,3549.65 TFT.2@5885.08,3549.65 cw(c5880.08,3549.65) TFT.2@5880.08,3544.65
PGND: 24VIN.2 D2.2 D3.2 D4.2 D5.2 D6.2 D7.2 D8.2 D9.2 D10.2 D11.2 D12.2 D13.2 LED1.2 LED2.2 LED3.2 LED4.2 LED5.2 LED6.2 LED7.2 LED8.2 LED9.2 LED10.2 LED11.2 LED12.2 U7.9 U7.11 U7.13 U7.15 U8.9 U8.11 U8.13 U8.15 U9.9 U9.11 U9.13 U9.15 | length 4497
  Top Layer w24: U7.15@2425.08,2987.75 2425.08,2919.65 ccw(c2465.08,2919.65) 2465.08,2879.65 2685.08,2879.65 ccw(c2685.08,2919.65) 2725.08,2919.65 v2(2725.08,2987.75) ; 2524.68,2879.65 ccw(c2524.68,2880.04) 2525.08,2880.04 U7.13@2525.08,2987.75 ; U7.11@2625.08,2987.75 2625.08,2879.96 ccw(c2625.4,2879.96) 2625.4,2879.65 ; U8.15@3140.08,2987.75 3140.08,2924.65 ccw(c3185.08,2924.65) 3185.08,2879.65 3385.08,2879.65 ccw(c3385.08,2934.65) 3440.08,2934.65 v2(3440.08,2987.75) ; U8.13@3240.08,2987.75 3240.08,2880.07 ccw(c3240.5,2880.07) 3240.5,2879.65 ; 3338.5,2879.65 ccw(c3338.5,2881.22) 3340.08,2881.22 U8.11@3340.08,2987.75
  Bottom Layer w24: v2(2725.08,2987.75) 2725.08,3079.65 cw(c2805.08,3079.65) 2805.08,3159.65 3365.08,3159.65 cw(c3365.08,3084.65) 3440.08,3084.65 v2(3440.08,2987.75) ccw(c3440.08,2992.75) 3445.08,2992.75 3445.08,3099.65 cw(c3505.08,3099.65) 3505.08,3159.65 4065.08,3159.65 cw(c4065.08,3069.65) 4155.08,3069.65 v2(4155.08,2987.75) ; v2(3855.08,2987.75) v2(3955.08,2987.75) v2(4055.08,2987.75) v2(4155.08,2987.75) ; v2(4345.08,3639.65) cw(c4345.08,3613.8) 4370.93,3613.8 4370.93,3276.26 4370.93,3125.5 cw(c4233.18,3125.5) 4233.18,2987.75 v2(4155.08,2987.75)
  other v1: 1980.93,3592.51 2015.93,3617.51 1980.93,3638.76 2015.93,3663.76 1980.93,3685.01 2015.93,3710.01 1980.93,3731.26 2015.93,3756.26 1980.93,3777.51 2015.93,3802.51
  other v2: 4345.08,3699.65
  other v4: 2030.08,3504.65 2231.9,3504.65 2433.72,3504.65 2635.54,3504.65 2837.35,3504.65 3039.17,3504.65 3240.99,3504.65 3442.81,3504.65 3644.63,3504.65 3846.44,3504.65 4048.26,3504.65 4250.08,3504.65
PHASE_LOSS: CN4.7 R42.1 | length 332.6
  Top Layer w24: CN4.7@6934.56,1854.65 6934.56,1909.13 cw(c6995.08,1909.13) 6995.08,1969.65 7045.08,1969.65 ccw(c7045.08,1999.65) 7075.08,1999.65 ccw(c7075.08,2001.26) 7076.69,2001.26 R42.1@7076.69,2084.65